# EAGLE board PCB v36 (EAGLE 9.7.0)
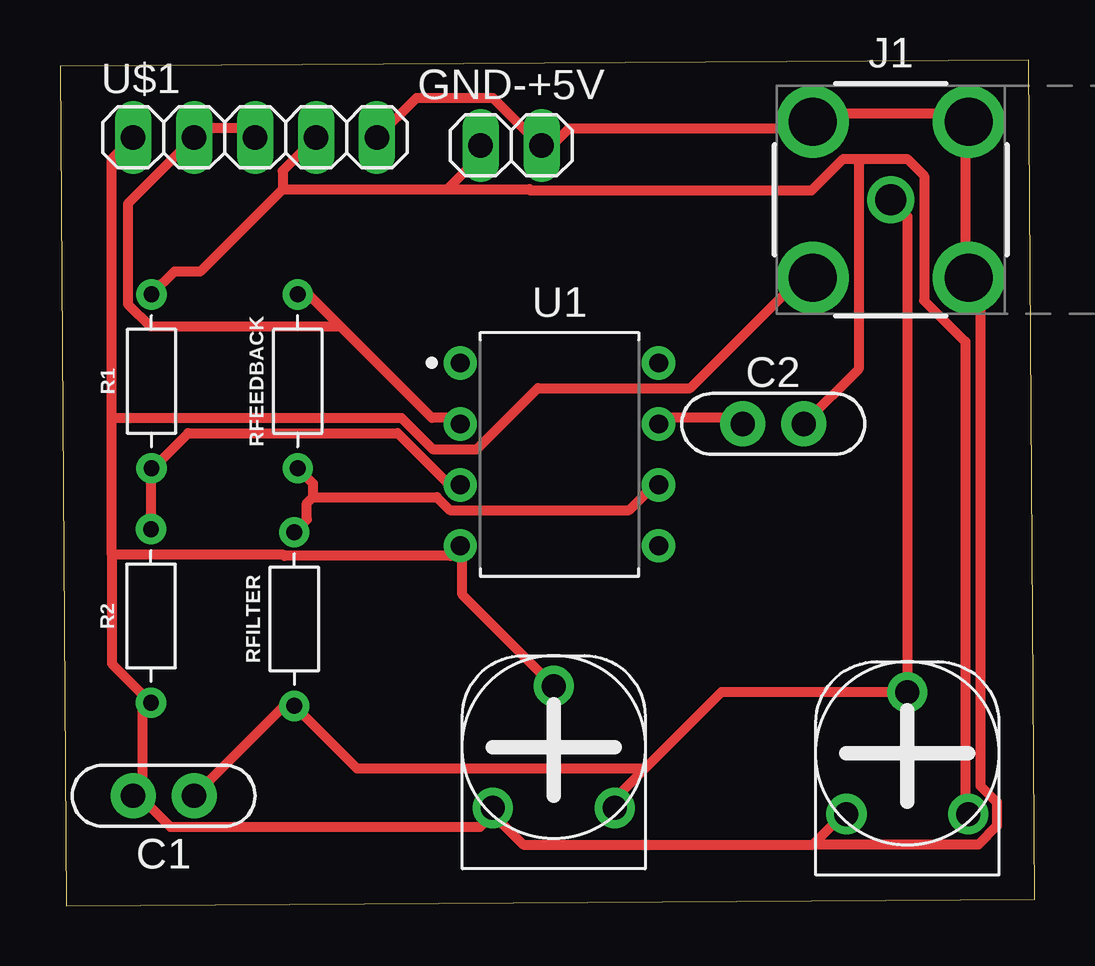
[diagram p0: board, top side]
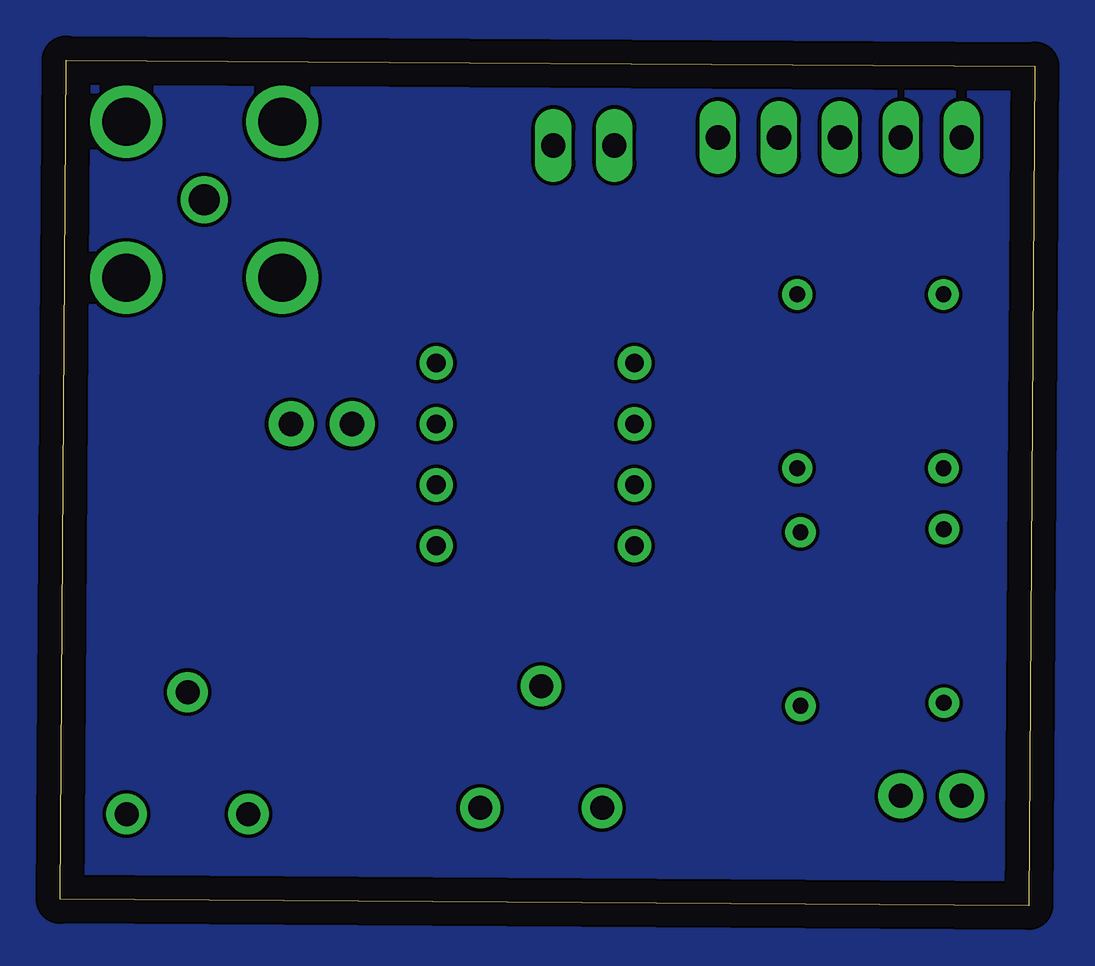
[diagram p1: board, bottom side, seen from below]

Size 40.62 x 35.23 mm. Coordinates in mm from the lower left corner, seen from the top.
Outline: 0.25,0 40.62,0.25 40.37,35.23 0,34.98 0.25,0
Copper layers (1*16): Top 0.035mm / dielectric 1.5mm / Bottom 0.035mm
Design rules "Fusion Electronics Design Rules": minimum track width 6mil, minimum drill 0.35mm, track to track 6mil, track to pad 6mil, pad to pad 6mil, via to via 6mil, smd to smd 6mil, copper to edge 40mil, drill to drill 6mil, minimum pad ring 10mil, minimum via ring 8mil, stop-mask expansion 4mil, vias tented up to drill 9999mil, thermal gap 10mil

## Footprints (pad centres in the part's own frame; a part is rotated, then mirrored left to right if it is on the bottom)
CAP-THRU-2.54MM = drill 1.016 pad 1.88: 1 -1.27,0; 2 1.27,0
1X02 = drill 1.016 long: 1 -1.27,0; 2 1.27,0
60711002241501 = drill 1.3: 1 0,0 | drill 2: 2 -3.25,3.25; 3 3.25,3.25; 4 3.25,-3.25; 5 -3.25,-3.25
RESAD724W46L381D178B = drill 0.66 pad 1.26: 1 -3.62,0; 2 3.62,0
HA-06-SM065 = drill 1 pad 1.676: 1 -2.54,-2.54; 2 0,2.54; 3 2.54,-2.54
DIP826W53P254L959H508Q8B = drill 0.786 pad 1.386: 1 -4.13,3.81; 2 -4.13,1.27; 3 -4.13,-1.27; 4 -4.13,-3.81; 5 4.13,-3.81; 6 4.13,-1.27; 7 4.13,1.27; 8 4.13,3.81
1X05 = drill 1.016 long: 1 -5.08,0; 2 -2.54,0; 3 0,0; 4 2.54,0; 5 5.08,0

## Placement (x,y rotation side)
C1  10u  [CAP-THRU-2.54MM]  4.32,4.57 180 top
C2  10u  [CAP-THRU-2.54MM]  29.72,20.07 0 top
GND-+5V  PINHD-1X2  [1X02]  18.8,31.67 0 top
J1  60711002241501  [60711002241501]  34.61,29.4 0 top
R1  1k  [RESAD724W46L381D178B]  3.81,21.84 90 top
R2  1k  [RESAD724W46L381D178B]  3.79,12.06 90 top
R3  [HA-06-SM065]  35.31,6.35 0 top
R4  [HA-06-SM065]  20.57,6.6 0 top
RFEEDBACK  24M  [RESAD724W46L381D178B]  9.91,21.84 270 top
RFILTER  47k  [RESAD724W46L381D178B]  9.76,11.94 270 top
U1  LM741  [DIP826W53P254L959H508Q8B]  20.81,18.8 0 top
U$1  PINHD-1X05_1X05M  [1X05]  8.13,32 0 top

## Library data of the parts
C1 C2 R3 R4 U$1 = Tinkercad
GND-+5V = Connector; CATEGORY: Connectors; DESCRIPTION: Header-Straight-2 Position; PACKAGE_TYPE: Through Hole; PITCH: 0.100" (2.54mm); SUBCATEGORY: Headers; TYPE: Male Pins
J1 = Wurth_Connectors_WR-BNC; DATASHEET-URL: https://www.we-online.com/redexpert/spec/60711002241501?ae; FREQUENCY-RANGE: DC~1 GHz; MOUNT: THT; OPERATING-TEMPERATURE: -65 °C up to +165 °C; PART-NUMBER: 60711002241501; SIZE: Right Angle Jack
R1 R2 RFEEDBACK RFILTER = Resistor; CATEGORY: Resistors; DESCRIPTION: Axial Resistor 7.24 mm pitch 3.81 mm body length 1.78 mm body diameter; PACKAGE_SIZE: Axial; PACKAGE_TYPE: Through Hole
U1 = IC_Linear; CATEGORY: Linear ICs; DESCRIPTION: General Purpose Amplifier 1 Circuit 8-PDIP; PACKAGE_SIZE: 8-PDIP; PACKAGE_TYPE: Through Hole; ROHS: Compliant; SERIES: LM741; SUBCATEGORY: Amplifiers; TYPE: General Purpose

## Nets
+5V: C2.2 GND-+5V.1 R1.2 R3.3 U$1.4
AGND: C1.2 GND-+5V.2 J1.2 J1.3 J1.4 J1.5 R2.1 R3.1 R4.1 R4.2 U1.4 U$1.1 U$1.5
N$1: C2.1 U1.7
N$2: C1.1 J1.1 R3.2 R4.3 RFILTER.2
N$3: RFEEDBACK.2 RFILTER.1 U1.6
N$4: R1.1 R2.2 U1.3
N$5: RFEEDBACK.1 U1.2 U$1.2 U$1.3

## Tracks (layer width: path | path; a pad name or v marks a point on that pad's centre or on a via)
+5V
  Top 0.406: 16.13,29.84 17.4,31.11 GND-+5V.1 | 9.27,29.84 16.13,29.84 | 33.27,31.11 32.64,31.11 31.32,29.79 19.6,29.79 19.55,29.84 16.13,29.84 | R1.2 4.76,26.42 5.84,26.42 9.27,29.84 | 33.27,31.11 35.29,31.11 36.01,30.4 36.01,25.2 37.72,23.5 37.72,3.94 R3.3 | 33.27,31.11 33.27,22.35 C2.2 | U$1.4 9.27,30.61 9.27,29.84
AGND
  Top 0.406: U$1.5 14.86,33.66 18.03,33.66 19.94,31.75 GND-+5V.2 20.57,31.75 21.21,32.38 30.73,32.38 J1.2 31.37,33.02 37.72,33.02 J1.3 37.72,32.38 37.72,26.67 J1.4 38.35,26.04 38.35,4.99 39.04,4.3 39.04,3.32 38.26,2.54 31.37,2.54 | 31.37,2.54 32.64,3.81 R3.1 | 31.37,2.54 19.3,2.54 18.03,3.81 | 18.03,3.81 R4.1 | 2.16,20.32 14.22,20.32 15.53,19.02 17.37,19.02 19.91,21.56 26.26,21.56 30.73,26.04 J1.5 | 2.16,14.61 9.32,14.61 9.36,14.57 16.27,14.57 U1.4 16.76,14.9 16.76,12.95 R4.2 | 2.16,20.32 2.16,31.11 U$1.1 | 18.03,3.81 17.5,3.28 4.6,3.28 3.3,4.57 C1.2 3.43,4.95 3.43,8.08 R2.1 2.16,10.08 2.16,14.61 | 2.16,14.61 2.16,20.32
GND
  pour Bottom: -3.86,-2.34 43.1,-2.34 43.48,-1.95 43.48,37.25 42.84,37.9 -3.86,37.9
N$1
  Top 0.406: U1.7 25.02,20.32 28.19,20.32 C2.1
N$2
  Top 0.406: 24.38,5.71 27.56,8.89 R3.2 35.31,28.71 J1.1 | 24.38,5.71 23.11,4.45 R4.3 | 24.38,5.71 12.37,5.71 RFILTER.2 9.33,8.32 C1.1
N$3
  Top 0.406: RFEEDBACK.2 10.54,17.59 10.54,17.02 | U1.6 24.38,17.14 23.72,16.48 16.25,16.48 15.71,17.02 10.54,17.02 | 10.54,17.02 10.29,16.76 10.29,16.08 RFILTER.1
N$4
  Top 0.406: U1.3 16.23,17.53 14.07,19.68 5.33,19.68 4.06,18.41 R1.1 3.81,15.7 R2.2
N$5
  Top 0.406: U$1.3 7.87,32.38 5.97,32.38 U$1.2 2.82,29.24 2.82,25.06 3.75,24.13 11.68,24.13 | 11.68,24.13 15.49,20.32 16.13,20.32 U1.2 | 11.68,24.13 10.41,25.4 RFEEDBACK.1